# Altium PCB PCB1.PcbDoc
Units mm, origin at the board's own origin, x right, y up, seen from the top; angles counter-clockwise.
Board outline 108.7 x 104.5 mm, 2 copper layers (Top Layer, Bottom Layer); 73 components, 40 nets, 200 pads, 23 vias.
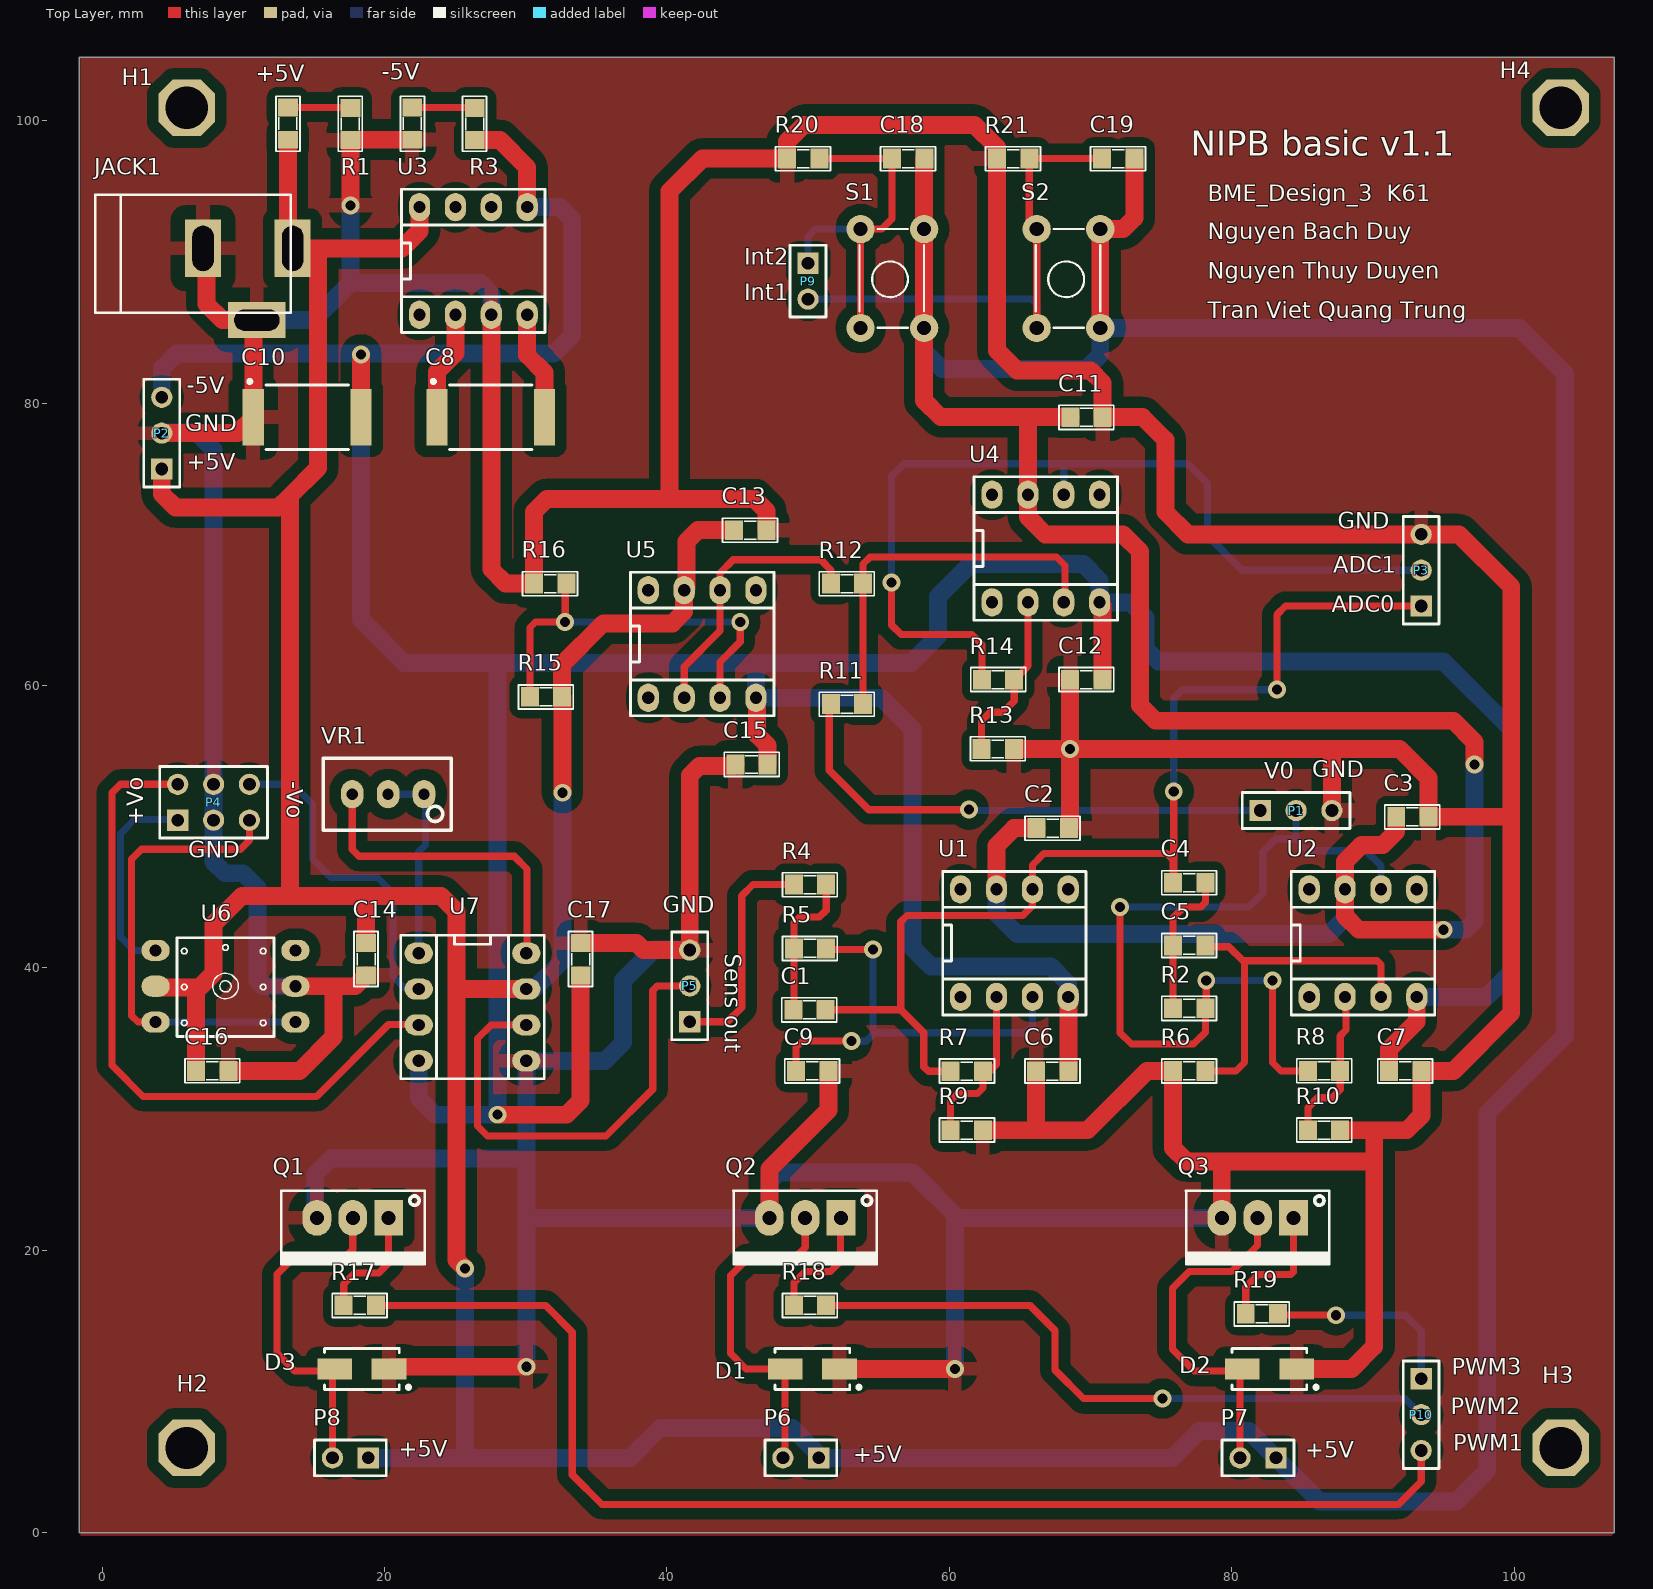
[diagram p0: Top Layer view]
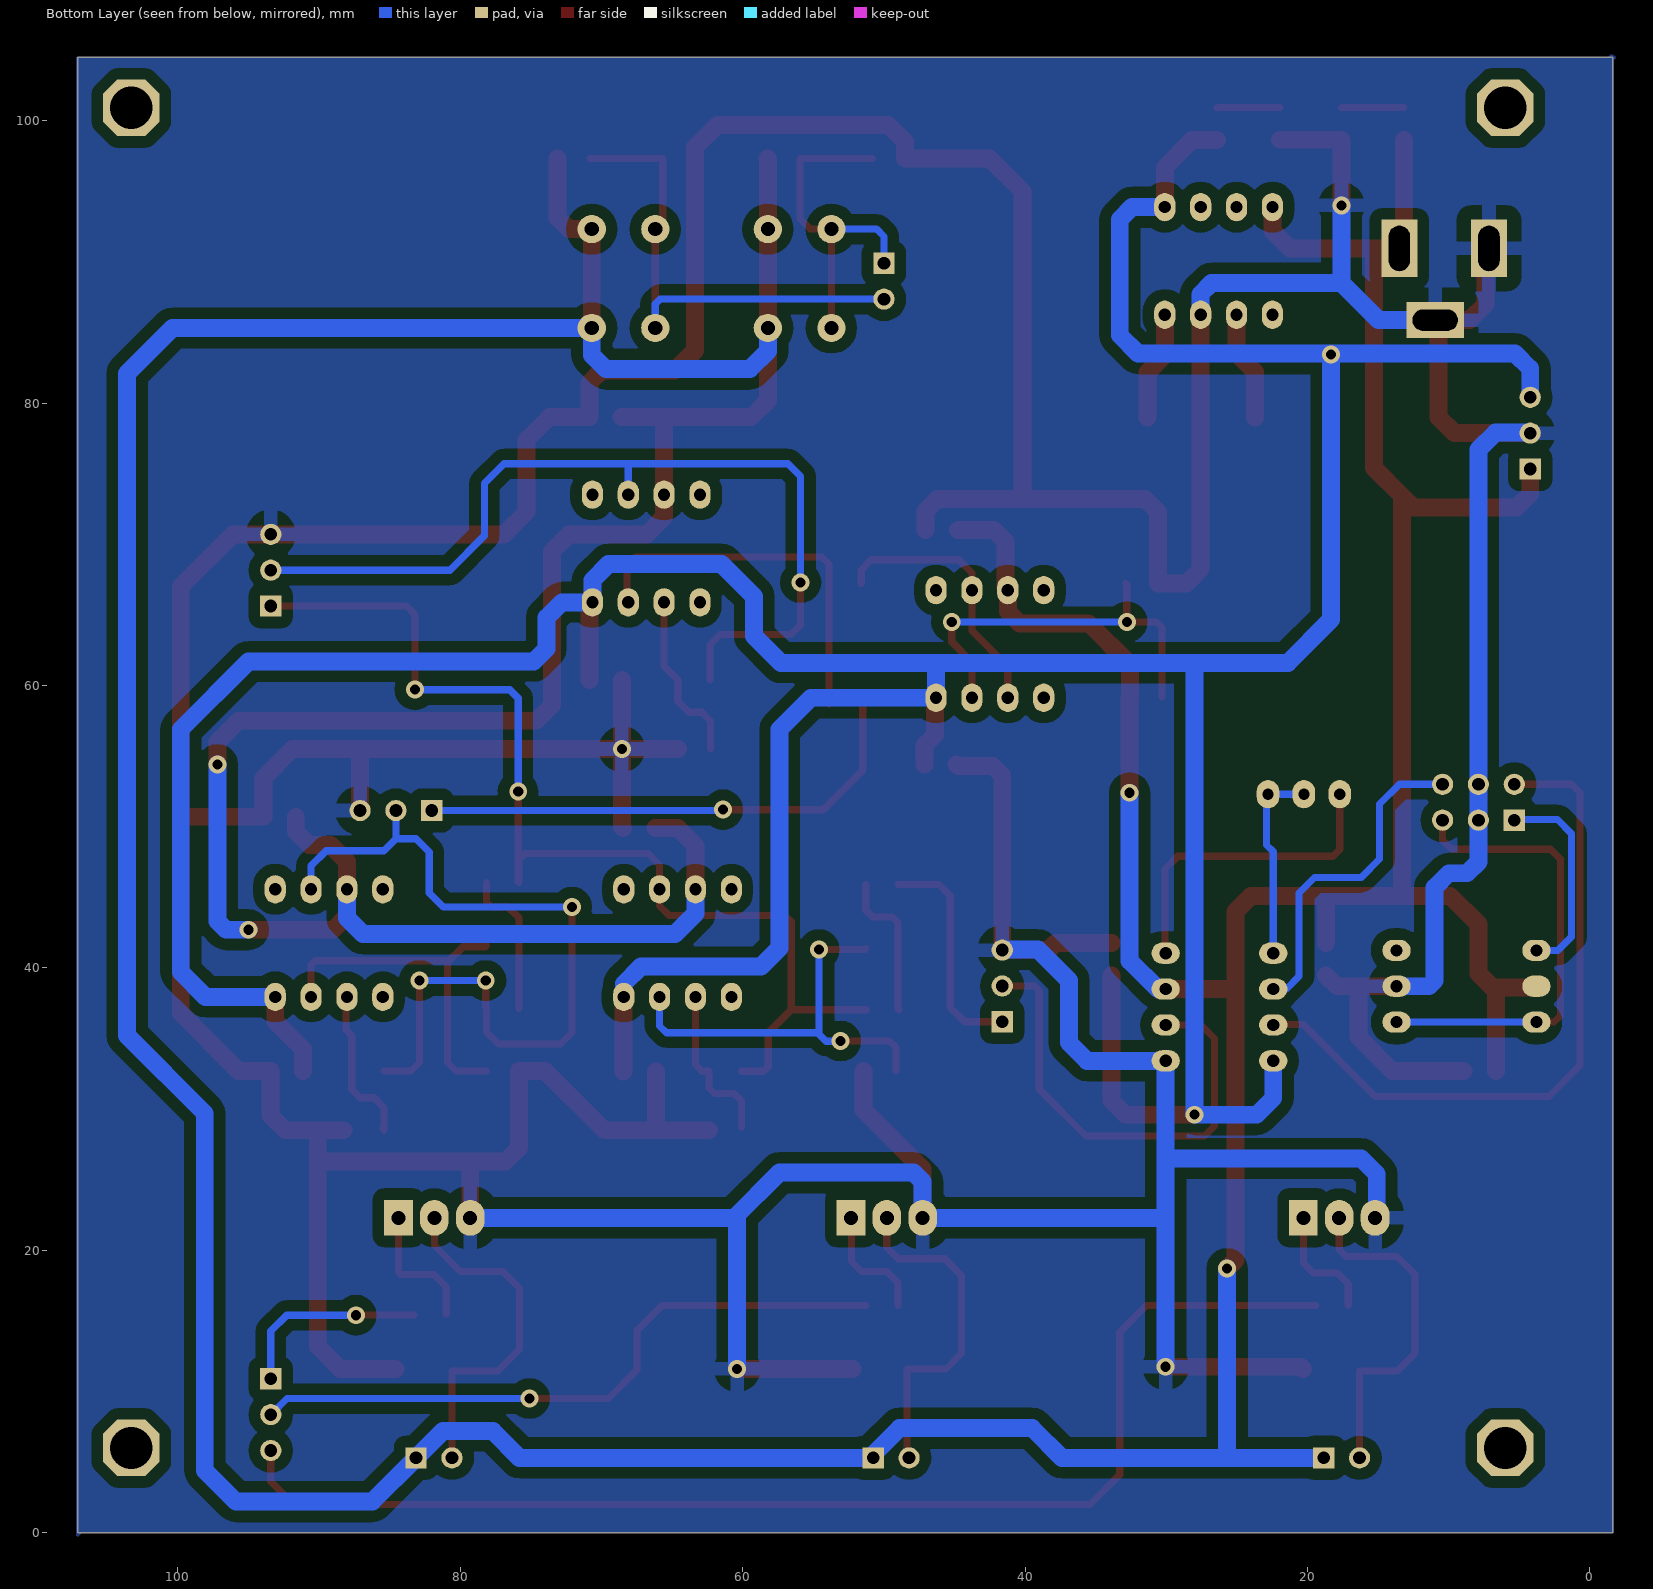
[diagram p1: Bottom Layer view, seen from below]
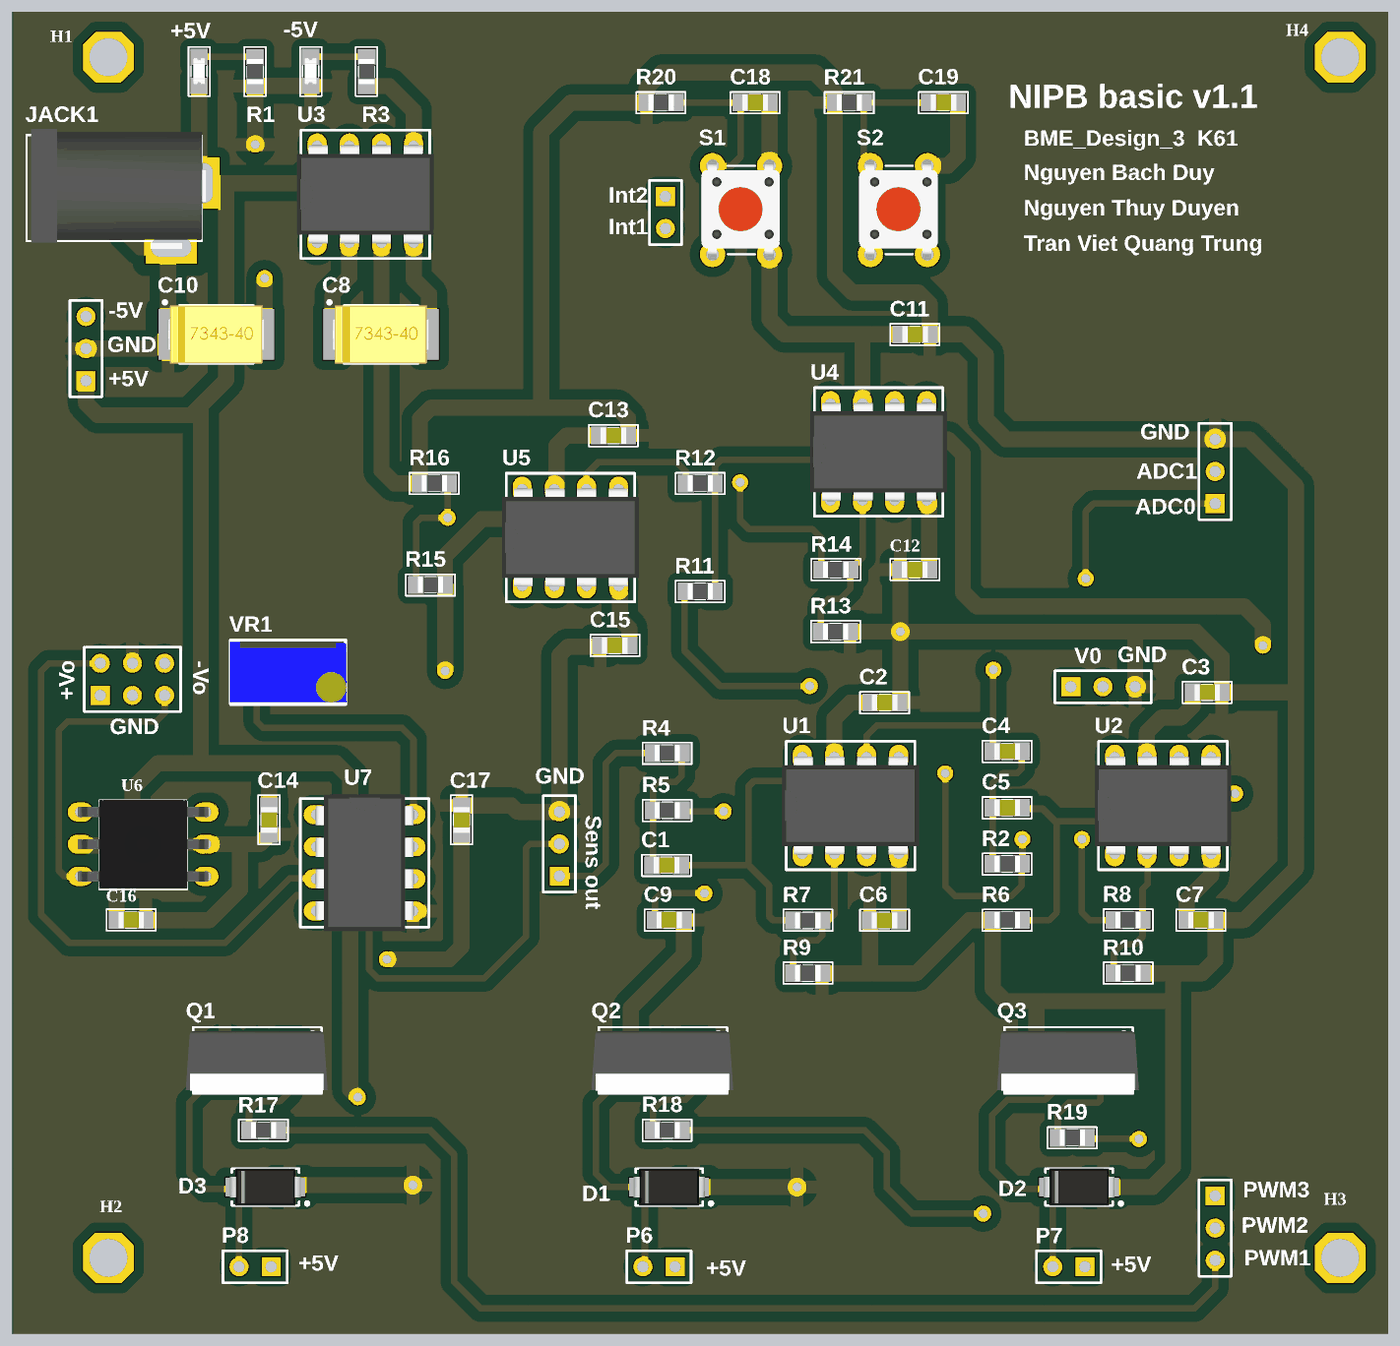
[diagram p2: 3D render of the assembled board from above, using the file's embedded part models]

## Layer stack, top to bottom
Top Solder: solder mask 0.0102, Solder Resist, Dk 3.5
Top Layer: signal copper 0.0356
Dielectric 1: dielectric 0.32, FR-4, Dk 4.8
Bottom Layer: signal copper 0.0356
Bottom Solder: solder mask 0.0102, Solder Resist, Dk 3.5

## Board outline
-1.6,0 107.1,0 107.1,104.5 -1.6,104.5

## Design rules (kind name [scope] priority, off if disabled: settings)
Clearance Clearance_1 [All] p1: gap=0.4 ignorepadtopadclearanceinfootprint=FALSE except(0.8: Arc-Fill Arc-Poly Arc-Region Track-Fill Track-Poly Track-Region SMDPad-Fill SMDPad-Poly SMDPad-Region THPad-Fill THPad-Poly THPad-Region Via-Fill Via-Poly Via-Region Fill-Fill Fill-Poly Fill-Region Poly-Poly Poly-Region Region-Region)
Clearance polygon_clearance [InPolygon] p2: gap=2 ignorepadtopadclearanceinfootprint=FALSE
PlaneClearance [All] p1: clearance=0.51
PolygonConnect [All] p1: connectstyle=Relief reliefconductorwidth=1 reliefentries=4 polygonreliefangle="90 Angle" airgapwidth=1
RoutingVias [All] p1: holewidth=0.711 width=1.27 viastyle="Through Hole" minholewidth=0.711 minwidth=1.27 maxholewidth=0.711 maxwidth=1.27
SolderMaskExpansion [All] p1: expansion=0.102
Width [All] p1: maxlimit=1.27 minlimit=0.3 preferedwidth=0.508
29 further rules are at their usual default settings.

## Components (designator, comment, footprint, x,y, rotation, side; value= is the part's Value field where it differs from the comment)
+5V "LED" "LED SMD 0805" 13.1,99.8 r90 top
-5V "LED" "LED SMD 0805" 21.906,99.8 r90 top
C1 "1uF" "0805 CAP" 50.1,37.039 r0 top
C2 "104" "0805 CAP" 67.325,49.9 r0 top
C3 "104" "0805 CAP" 92.8,50.7 r0 top
C4 "10uF" "0805 CAP" 77,46.035 r0 top
C5 "10uF" "0805 CAP" 77,41.59 r0 top
C6 "104" "0805 CAP" 67.3,32.675 r180 top
C7 "104" "0805 CAP" 92.3,32.7 r0 top
C8 "10uF" "CAP TANTALUM SMD7434" 27.4,78.989 r0 top
C9 "1uF" "0805 CAP" 50.3,32.7 r0 top
C10 "10uF" "CAP TANTALUM SMD7434" 14.4,78.989 r0 top
C11 "104" "0805 CAP" 69.725,79 r0 top
C12 "104" "0805 CAP" 69.7,60.4 r180 top
C13 "104" "0805 CAP" 45.904,71 r0 top
C14 "104" "0805 CAP" 18.7,40.61 r270 top
C15 "104" "0805 CAP" 46,54.4 r180 top
C16 "104" "0805 CAP" 7.8,32.7 r180 top
C17 "104" "0805 CAP" 33.9,40.61 r270 top
C18 "104" "0805 CAP" 57.093,97.315 r0 top
C19 "104" "0805 CAP" 71.964,97.315 r0 top
D1 "DIODE" "DIODE SMA" 50.3,11.6 r180 top
D2 "DIODE" "DIODE SMA" 82.674,11.6 r180 top
D3 "DIODE" "DIODE SMA" 18.4,11.6 r180 top
H1 "HOLE" HOLE 6,100.9 r0 top
H2 "HOLE" HOLE 6,6 r0 top
H3 "HOLE" HOLE 103.3,6 r0 top
H4 "HOLE" HOLE 103.3,100.9 r0 top
JACK1 "JACK DC" "JACK DC" 10.328,88.41 r0 top value="Jac DC"
P1 "Header 3H" HDR1X3 82.02,51.143 r0 top
P2 "Header 3H" HDR1X3 4.232,75.329 r90 top
P3 "Header 3H" HDR1X3 93.424,65.62 r90 top
P4 "Header 3X2" HDR2X3 5.36,50.46 r0 top
P5 "Header 3H" HDR1X3 41.623,36.179 r90 top
P6 "Valve" HDR1X2 50.76,5.3 r180 top
P7 "Valve" HDR1X2 83.134,5.3 r180 top
P8 "Pump" HDR1X2 18.86,5.3 r180 top
P9 "Header 2H" HDR1X2 50,89.9 r270 top
P10 "Header 3H" HDR1X3 93.424,10.9 r270 top
Q1 "TIP41C" QTO-220 20.3,22.3 r180 top
Q2 "TIP41C" QTO-220 52.34,22.3 r180 top
Q3 "TIP41C" QTO-220 84.38,22.3 r180 top
R1 "10k" "0805 RESISTOR" 17.594,100.908 r270 top value="R1/4W - 1K"
R2 "33k" "0805 RESISTOR" 75.857,37.145 r0 top value="R1/4W - 1K"
R3 "10k" "0805 RESISTOR" 26.4,100.908 r270 top value="R1/4W - 1K"
R4 "33k" "0805 RESISTOR" 49,45.9 r0 top value="R1/4W - 1K"
R5 "33k" "0805 RESISTOR" 49,41.378 r0 top value="R1/4W - 1K"
R6 "33K" "0805 RESISTOR" 75.857,32.7 r0 top value="R1/4W - 1K"
R7 "5.6k" "0805 RESISTOR" 62.386,32.675 r180 top value="R1/4W - 1K"
R8 "5.6k" "0805 RESISTOR" 87.686,32.7 r180 top value="R1/4W - 1K"
R9 "10k" "0805 RESISTOR" 62.386,28.5 r180 top value="R1/4W - 1K"
R10 "10k" "0805 RESISTOR" 87.686,28.5 r180 top value="R1/4W - 1K"
R11 "10k" "0805 RESISTOR" 51.614,58.684 r0 top value="R1/4W - 1K"
R12 "10k" "0805 RESISTOR" 51.614,67.218 r0 top value="R1/4W - 1K"
R13 "10k" "0805 RESISTOR" 64.575,55.5 r180 top value="R1/4W - 1K"
R14 "10k" "0805 RESISTOR" 64.6,60.4 r180 top value="R1/4W - 1K"
R15 "10k" "0805 RESISTOR" 30.3,59.2 r0 top value="R1/4W - 1K"
R16 "2.2k" "0805 RESISTOR" 30.6,67.218 r0 top value="R1/4W - 1K"
R17 "10k" "0805 RESISTOR" 17.114,16.1 r0 top value="R1/4W - 1K"
R18 "10k" "0805 RESISTOR" 49,16.1 r0 top value="R1/4W - 1K"
R19 "10k" "0805 RESISTOR" 81,15.5 r0 top value="R1/4W - 1K"
R20 "10k" "0805 RESISTOR" 48.515,97.315 r0 top value="R1/4W - 1K"
R21 "10k" "0805 RESISTOR" 63.386,97.315 r0 top value="R1/4W - 1K"
S1 "SWITCH" "SW 4PIN" 58.222,92.318 r270 top
S2 "SWITCH" "SW 4PIN" 70.694,92.318 r270 top
U1 "LM741" "DIP 8" 64.617,41.755 r0 top
U2 "LM741" "DIP 8" 89.3,41.755 r0 top
U3 "ICL7660" "DIP 8" 26.3,90.064 r0 top
U4 "LM741" "DIP 8" 66.838,69.7 r0 top
U5 "LM741" "DIP 8" 42.498,62.938 r0 top
U6 "MPS20N0040D" MPS20N0040D-S 13.7,41.24 r270 top
U7 "INA-129" "DIP 8" 26.241,37.229 r270 top
VR1 "10K" RVAR 20.26,52.3 r180 top value="VR 10K"

## Footprints (in the part's own frame and the unit in brackets; to place one, negate y for a bottom-side part, rotate by r counter-clockwise, add the part's x,y. Pads: shape width x height; smd on the part's side, far side on the other; paste and mask are expansions set on the pad)
"0805 CAP" [mil] "Compoment SMD 80x50mil"
  rect 50x55 smd: 1(-45,0) 2(45,0)
  silkscreen extent -77,-34 76,33, body extent -40,-25 40,25, height 24
"0805 RESISTOR" [mil] "Compoment SMD 80x50mil"
  rect 50x55 smd: 1(0,0) 2(90,0)
  silkscreen extent -32,-34 121,33, body extent 6,-25 84,25, height 24
"CAP TANTALUM SMD7434" [mm] "227C-220uF 16V"
  rect 1.5x4 smd: 1(-3.683,0) 2(3.937,0)
  silkscreen extent -4.06,-2.29 3.05,2.66, body extent -3.68,-2.3 3.92,2.3, height 4
"DIODE SMA" [mm]
  rect 2.45x1.5 smd: 1(-1.925,0) 2(1.925,0)
  silkscreen extent -3.43,-1.45 2.65,1.45, body extent -2.8,-1.48 2.8,1.47, height 2.7
"DIP 8" [mm] "W.300/L.400"
  oval 1.5x2 hole 0.864: 1(-3.81,-3.81) 2(-1.27,-3.81) 3(1.27,-3.81) 4(3.81,-3.81) 5(3.81,3.81) 6(1.27,3.81) 7(-1.27,3.81) 8(-3.81,3.81)
  silkscreen extent -5.08,-5.08 5.08,5.08, body extent -5.4,-3.88 5.4,3.88, height 4.5
HDR1X2 [mm] "Connector; Header; 2 Position"
  rect 1.5x1.5 hole 0.9: 1(0,0)
  round 1.5 hole 0.9: 2(2.54,0)
  silkscreen extent -1.27,-1.27 3.81,1.27
HDR1X3 [mm] "Connector; Header; 3 Position"
  rect 1.5x1.5 hole 0.9: 1(0,0)
  round 1.5 hole 0.9: 2(2.54,0) 3(5.08,0)
  silkscreen extent -1.27,-1.27 6.35,1.27
HDR2X3 [mm] "Connector; Header; 3x2 Position"
  rect 1.5x1.5 hole 0.9: 1(0,0)
  round 1.5 hole 0.9: 2(0,2.54) 3(2.54,0) 4(2.54,2.54) 5(5.08,0) 6(5.08,2.54)
  silkscreen extent -1.27,-1.27 6.35,3.81
HOLE [mm]
  oct 4x4 hole 3: H(0,0)
"JACK DC" [mm] "Jac DC input"
  rect 2.54x4.064 hole 1.5 slot 3.2 at 90 deg: 1(3.175,2.54) 2(-3.175,2.54)
  rect 4.064x2.54 hole 1.5 slot 3.2 at 0 deg: 3(0.635,-2.54)
  silkscreen extent -10.79,-2.03 3.05,6.35, body extent -10.42,-2.67 3.4,6.84, height 11.02
"LED SMD 0805" [mil] "Compoment SMD 80x50mil"
  rect 50x55 smd: 1(-45.39,-2.58) 2(44.61,-2.58)
  silkscreen extent -77,-37 76,30, body extent -41,-21 41,15, height 33
MPS20N0040D-S [mm]
  oval 1.5x2 hole 0.864: 1(5.08,-9.906) 3(0,-9.906) 4(0,0) 5(2.54,0) 6(5.08,0)
  oval 1.5x2 all layers, no hole: 2(2.54,-9.906)
  silkscreen extent -0.89,-8.38 6.1,-1.52, body extent -0.96,-10.1 6.04,0.2, height 10
QTO-220 [mil] "TO-220 - 1-2-3"
  rect 80x100 hole 39: 1(0,0)
  oval 80x100 hole 39: 2(100,0) 3(200,0)
  silkscreen extent -100,-76 300,130, body extent -119,-64 322,121, height 755
RVAR [mm] "Bien tro vi chinh"
  oval 1.6x2 hole 0.8: 1(-2.54,0) 2(0,0) 3(2.54,0)
  silkscreen extent -4.47,-2.54 4.6,2.54, body extent -4.54,-2.4 4.66,2.4, height 12.02
"SW 4PIN" [mm] "SW button 4pin, 250 x250 mil"
  round 2 hole 1: 1(0,0) 1(7,0) 2(0,-4.5) 2(7,-4.5)
  silkscreen extent 0,-4.57 6.98,0, body extent -0.52,-5.39 7.38,0.81, height 7

## Part data
C1 C2 C3 C4 C5 C6 C7 C9 C11 C12 C13 C14 C15 C16 C17 C18 C19: library part "CAP CERAMIC", LatestRevisionDate=17-Jul-2002, LatestRevisionNote="Re-released for DXP Platform.", PackageReference=RAD-0.3, Published=8-Jun-2000, Publisher="Altium Limited"
C8 C10: library part CAPACITOR
P6 P7 P8: library part "Header 2H", LatestRevisionDate=17-Jul-2002, LatestRevisionNote="Re-released for DXP Platform.", Publisher="Altium Limited"
Q1 Q2 Q3: "NPN 2W, BCE", =H1061
R1 R2 R3 R4 R5 R6 R7 R8 R9 R10 R11 R12 R13 R14 R15 R16 R17 R18 R19 R20 R21: library part RESISTOR
U3: library part ICL7660SIBAZ, "ICL7660 Series 1.5 - 12 Vin 45 mA 10-35 kHz CMOS Voltage Converter - SOIC-8", Package="SOIC-8 Intersil", Availability=Unavailable, MF="Renesas Electronics", MP=ICL7660SIBAZ, Price=None, SnapEDA_Link=https://www.snapeda.com/parts/ICL7660SIBAZ/Renesas%20Electronics%20America%20Inc./view-part/?ref=snap
VR1: library part "VAR RES"
P1 P2 P3 P4 P5 P9 P10: LatestRevisionDate=17-Jul-2002, LatestRevisionNote="Re-released for DXP Platform.", Publisher="Altium Limited"
S1 S2: LatestRevisionDate=17-Jul-2002, LatestRevisionNote="Re-released for DXP Platform.", PackageReference=SPST-2, Published=24-Mar-1999, Publisher="Altium Limited"

## Via types
v1: diameter 1.27, hole 0.711, Top Layer to Bottom Layer, 23 vias

## Nets (pads, with @x,y where several pads share a name; then routed paths per layer and width w, separated by ;. In a path a pad name is that pad's centre, name@x,y a point inside that pad or via, vN(x,y) a via of type N, cw(c..) or ccw(c..) an arc to the next point about the centre after c; other vN are vias at no path point)
+5V: +5V.1 C2.1 C3.1 C11.1 C13.1 C14.1 C16.2 C18.2 C19.2 JACK1.1 P2.1 P6.1 P7.1 P8.1 R15.2 S1.1 S2.1 U1.7 U2.7 U3.8 U4.7 U5.7 U6.2 U7.7 | length 576.5
  Top Layer w1.27: U6.2@4.056,38.613 6.913,38.613 ; P2.1 4.232,73.568 5.2,72.6 12.5,72.6 13.3,73.4 ; C16.2 6.657,38.357 6.913,38.613 ; +5V.1 13.165,91.288 JACK1.1 15.3,90.95 ; C14.1 18.7,44.5 ; U3.8 22.49,92.19 21.25,90.95 15.3,90.95 ; v1(25.7,18.7) 25.1,19.3 25.1,44 24,45.1 13.3,45.1 ; U7.7 25.701,38.499 ; v1(32.6,52.4) 32.6,59.186 R15.2 32.586,61.486 35.5,64.4 40.4,64.4 41.228,65.228 U5.7 41.4,66.92 41.4,70.2 42.2,71 C13.1 ; C18.2 58.222,97.301 58.222,92.318 58.222,85.318 58.222,80.178 59.4,79 65.568,79 ; U1.7 63.347,48.647 64.6,49.9 C2.1 ; C11.1 65.568,79 ; S2.1@70.694,85.318 70.694,92.318 72.318,92.318 73.107,93.107 C19.2 ; C3.1 91.657,49.657 90.7,48.7 89.2,48.7 88.03,47.53 U2.7 88.03,43.67 89,42.7 v1(95,42.7) ; v1(97.2,54.4) 97.2,56 95.7,57.5 74.6,57.5 73.5,58.6 73.5,69.5 72.3,70.7 66.8,70.7 65.568,71.932 U4.7 65.568,79 ; 6.913,38.613 7.9,39.6 7.9,43.1 9.9,45.1 13.3,45.1 ; 13.3,45.1 13.3,73.4 ; 13.3,73.4 15.3,75.4 15.3,90.95 ; 25.7,38.5 25.701,38.499
  Bottom Layer w1.27: P8.1 25.8,5.3 ; v1(25.7,18.7) 25.7,5.4 25.8,5.3 ; U7.7 30.599,38.499 32.6,40.5 v1(32.6,52.4) ; S1.1@58.222,85.318 58.222,83.678 59.5,82.4 69.7,82.4 70.694,83.394 70.694,85.318 100.382,85.318 103.6,82.1 103.6,35.2 98.1,29.7 98.1,4.4 95.9,2.2 86.234,2.2 P7.1 81.234,7.2 77.7,7.2 75.8,5.3 P6.1 50.76,5.54 48.9,7.4 39.5,7.4 37.4,5.3 25.8,5.3 ; U1.7 63.347,43.853 64.8,42.4 86.9,42.4 88.03,43.53 U2.7 ; v1(95,42.7) 96.6,42.7 97.2,43.3 v1(97.2,54.4)
-5V: C6.1 C7.1 C10.2 C12.1 C15.1 C17.2 P2.3 R3.2 U1.4 U2.4 U3.5 U4.4 U5.4 U7.4 | length 313.9
  Top Layer w1.27: C10.2 v1(18.337,83.437) ; R3.2 28.178,98.622 30.11,96.69 U3.5 ; v1@28.3,29.6 32.9,29.6 33.9,30.6 C17.2 ; U5.4 46.4,59.036 46.4,56.5 47.143,55.757 C15.1 ; U1.4 68.443,37.929 C6.1 ; U4.4 70.843,65.695 C12.1 ; C7.1 91.157,34.257 93.11,36.21 U2.4
  Bottom Layer w1.27: P2.3 4.232,82.432 5.3,83.5 32,83.5 33.3,84.8 33.3,93 32.426,93.874 U3.5 ; v1(18.337,83.437) 18.337,64.663 21.4,61.6 28,61.6 ; U7.4 22.431,30.769 23.6,29.6 v1(28,29.6) 28,61.6 ; U1.4 68.427,38.873 67.2,40.1 58.7,40.1 57.4,41.4 57.4,56.9 55.172,59.128 U5.4 46.308,61.6 ; U2.4 98.045,37.945 99.8,39.7 99.8,56.9 95,61.7 74.8,61.7 73.9,62.6 73.9,64.8 72.81,65.89 U4.4 70.648,67.452 69.5,68.6 61.5,68.6 59.2,66.3 59.2,63.5 57.3,61.6 46.308,61.6 ; 28,61.6 46.308,61.6
ADC0: C1.2 C4.1 P3.1 R7.2 U1.6 | length 79.5
  Top Layer w0.508: C1.2 56.561,37.039 ; R7.2 58.525,32.675 58.2,33 58.2,35.4 56.561,37.039 ; v1(75.9,52.5) 75.9,46.078 C4.1 75.857,47.643 75.4,48.1 66.7,48.1 65.887,47.287 U1.6 65.887,44.387 65.2,43.7 57,43.7 56.561,43.261 56.561,37.039 ; v1(83.2,59.7) 83.2,65 83.82,65.62 P3.1
  Bottom Layer w0.508: v1(75.9,52.5) 75.9,59.1 76.5,59.7 v1(83.2,59.7)
ADC1: P3.2 R14.2 U4.6 | length 65.4
  Top Layer w0.508: v1(55.9,67.3) 55.9,64.3 56.6,63.6 61.6,63.6 62.314,62.886 R14.2
  Bottom Layer w0.508: v1(55.9,67.3) 55.9,74.8 56.8,75.7 68.1,75.7 ; U4.6 68.108,75.692 68.1,75.7 ; P3.2 80.74,68.16 78.3,70.6 78.3,74.3 76.9,75.7 68.1,75.7
GND: -5V.1 C2.2 C3.2 C6.2 C7.2 C9.2 C10.1 C11.2 C12.2 C13.2 C14.2 C15.2 C16.1 C17.1 D1.1 D2.1 D3.1 JACK1.2 JACK1.3 P1.3 P2.2 P3.3 P4.3 P4.4 P5.3 Q1.3 Q2.3 Q3.3 R1.2 R6.1 R9.1 R10.1 R13.1 R16.1 R20.1 R21.1 U3.3 U6.5 U7.5 | length 617
  Top Layer w1.27: P2.2 9.597,77.869 C10.1 10.717,85.624 JACK1.3 8.53,85.87 7.4,87 7.4,90.703 JACK1.2 ; C16.1 14,32.7 16.4,35.1 16.4,38.7 ; U6.5@13.8,38.7 16.4,38.7 ; v1(17.6,94) 17.594,94.006 R1.2 17.619,98.647 -5V.1 ; C14.2 17.933,38.7 16.4,38.7 ; D3.1 20.476,11.751 v1(30.051,11.751) ; U3.3 27.57,68.23 28.582,67.218 R16.1 30.6,72.3 31.5,73.2 40.1,73.2 ; C17.1 37.847,41.753 38.341,41.259 P5.3 41.623,53.623 42.3,54.3 44.757,54.3 C15.2 ; C13.2 47.047,72.353 46.2,73.2 40.1,73.2 ; Q2.3 47.26,25.76 51.443,29.943 C9.2 ; D1.1 v1@60.2,11.6 ; R9.1 66.093,28.5 ; R13.1 v1(68.557,55.5) ; C6.2 66.157,28.564 66.093,28.5 ; C2.2 68.557,49.989 v1(68.557,55.5) ; C12.2 v1(68.557,55.5) ; Q3.3 79.3,26.3 ; D2.1 88.5,11.6 90.1,13.2 90.1,26.3 ; P1.3 87.1,55.1 87.5,55.5 ; R10.1@88.286,28.5 90.1,28.5 ; 40.1,73.2 40.2,73.3 40.2,95 42.515,97.315 R20.1 48.515,98.515 49.7,99.7 61.8,99.7 63.386,98.114 R21.1 63.386,83.714 64.8,82.3 70,82.3 70.868,81.432 C11.2 73.7,79 75.3,77.4 75.3,72.3 76.9,70.7 P3.3 96.1,70.7 99.8,67 99.8,50.7 ; 66.093,28.5 69.8,28.5 74,32.7 R6.1 75.857,27.243 76.8,26.3 79.3,26.3 ; v1(68.557,55.5) 87.5,55.5 ; 79.3,26.3 90.1,26.3 ; 87.5,55.5 91.9,55.5 93.943,53.457 C3.2 99.8,50.7 ; 90.1,26.3 90.1,28.5 ; 90.1,28.5 92.4,28.5 93.443,29.543 C7.2 95.7,32.7 99.8,36.8 99.8,50.7
  Bottom Layer w1.27: P2.2 4.263,77.9 6.7,77.9 7.9,76.7 P4.4 P4.3 7.9,47.5 8.7,46.7 10,46.7 11,45.7 11,39.1 11.4,38.7 U6.5 ; JACK1.3 14.97,85.87 17.6,88.5 ; Q1.3 15.1,22.42 15.1,25.4 16.2,26.5 30.051,26.5 ; v1(17.6,94) 17.6,88.5 ; U3.3 27.57,87.67 27.6,87.7 26.8,88.5 17.6,88.5 ; v1(30.051,11.751) 30.051,22.2 ; P5.3 41.582,41.3 39.1,41.3 36.9,39.1 36.9,34.7 35.619,33.419 U7.5 30.051,26.5 ; v1(60.4,11.6) 60.4,22.1 60.6,22.3 ; Q3.3 60.6,22.3 ; 30.051,22.2 30.051,26.5 ; 30.051,22.2 30.151,22.3 Q2.3 47.26,24.86 47.9,25.5 57.4,25.5 60.6,22.3
Interrupt2: C19.1 P9.2 R21.2 S2.2 | length 35.4
  Top Layer w0.508: S2.2@66.194,85.318 66.194,92.318 65.672,92.84 R21.2 C19.1
  Bottom Layer w0.508: P9.2 65.84,87.36 66.194,87.006 S2.2@66.194,85.318
Net+5V_2: +5V.2 R1.1 | length 4.4
  Top Layer w0.508: +5V.2 17.568,100.933 R1.1
Net-5V_2: -5V.2 R3.1 | length 4.4
  Top Layer w0.508: -5V.2 26.375,100.933 R3.1
NetC1_1: C1.1 R4.2 R5.1 | length 10.6
  Top Layer w0.508: C1.1 49,37.082 R5.1 49,43.2 49.4,43.6 50.8,43.6 51.286,44.086 R4.2
NetC4_2: C4.2 C5.1 R2.1 | length 10.5
  Top Layer w0.508: R2.1 C5.1 75.857,43.557 76.6,44.3 77.8,44.3 78.143,44.643 C4.2
NetC5_2: C5.2 R6.2 U2.3 | length 25.5
  Top Layer w0.508: R6.2 80.3,32.7 80.9,33.3 80.9,40.4 80.8,40.5 ; C5.2 78.233,41.5 79.8,41.5 80.8,40.5 ; U2.3 90.57,40.23 90.3,40.5 80.8,40.5
NetC8_1: C8.1 U3.2 | length 7.8
  Top Layer w1.27: C8.1 23.717,82.217 25.03,83.53 U3.2
NetC8_2: C8.2 U3.4 | length 7.8
  Top Layer w1.27: U3.4 30.11,83.39 31.337,82.163 C8.2
NetC9_1: C9.1 R5.2 U1.3 | length 30.2
  Top Layer w0.508: C9.1 49.157,34.374 49.6,34.817 53.067,34.817 53.083,34.8 v1@53.1,34.8 ; R5.2 51.364,41.3 v1(54.6,41.3)
  Bottom Layer w0.508: v1(53.083,34.817) 53.1,34.8 54.1,34.8 54.6,35.3 v1(54.6,41.3) ; 54.8,35.4 65.4,35.4 65.887,35.887 U1.3
NetC18_1: C18.1 P9.1 R20.2 S1.2 | length 24.8
  Top Layer w0.508: R20.2 C18.1 55.95,93.05 55.218,92.318 53.722,92.318 S1.2@53.722,85.318
  Bottom Layer w0.508: P9.1 50,91.8 50.518,92.318 S1.2@53.722,92.318
NetD1_2: D1.2 P6.2 Q2.2 | length 24.4
  Top Layer w0.508: P6.2 48.375,5.455 D1.2 45.6,11.6 44.5,12.7 44.5,18.2 45.7,19.4 49,19.4 49.8,20.2 Q2.2
NetD2_2: D2.2 P7.2 Q3.2 | length 25.1
  Top Layer w0.508: P7.2 80.594,11.445 77.355,11.445 75.8,13 75.8,17.3 77,18.5 80,18.5 81.84,20.34 Q3.2
NetD3_2: D3.2 P8.2 Q1.2 | length 24.5
  Top Layer w0.508: P8.2 16.32,11.445 13.655,11.445 12.4,12.7 12.4,18.3 13.66,19.56 17.26,19.56 17.76,20.06 Q1.2
NetP1_2: P1.2 R2.2 R8.2 U2.6 | length 59.2
  Top Layer w0.508: v1(72.1,44.3) 72.1,35.4 72.9,34.6 77.3,34.6 78.143,35.443 R2.2 78.2,37.202 v1(78.2,39.1) ; v1(82.9,39.1) 82.9,33.3 83.5,32.7 R8.2
  Bottom Layer w0.508: v1(72.1,44.3) 81.2,44.3 82.2,45.3 82.2,48.2 83.14,49.14 84.56,49.14 ; v1(78.2,39.1) v1(82.9,39.1) ; P1.2 84.56,49.14 ; U2.6 90.57,47.23 89.5,48.3 85.4,48.3 84.56,49.14
NetP4_1: P4.1 U6.3 | length 14.7
  Bottom Layer w0.508: U6.3 2.26,41.24 1.3,42.2 1.3,49.5 2.3,50.5 5.32,50.5 P4.1
NetP4_2: P4.2 U7.3 | length 49
  Top Layer w0.508: P4.2 1.3,53 0.7,52.4 0.7,33.1 2.9,30.9 15.2,30.9 20.3,36 22.39,36 U7.3
NetP4_5: P4.5 U6.1 U6.6 | length 33.2
  Top Layer w0.508: U6.1 2.54,36.16 2.1,36.6 2.1,47.7 2.8,48.4 9.8,48.4 10.44,49.04 P4.5
  Bottom Layer w0.508: U6.1 U6.6
NetP4_6: P4.6 U7.2 | length 23.7
  Bottom Layer w0.508: P4.6 13.5,53 14.9,51.6 14.9,47.7 16.2,46.4 19.5,46.4 20.6,45.3 20.6,39.4 21.501,38.499 U7.2
NetP5_2: P5.2 U7.6 | length 33.9
  Top Layer w0.508: U7.6 27.559,35.959 26.6,35 26.6,28.8 27.3,28.1 35.7,28.1 39,31.4 39,38.4 39.319,38.719 P5.2
NetQ1_1: Q1.1 R17.1 | length 8.5
  Top Layer w0.508: R17.1 17.114,17.614 17.9,18.4 19.6,18.4 20.3,19.1 Q1.1
NetQ2_1: Q2.1 R18.1 | length 8.6
  Top Layer w0.508: R18.1 49,17.7 49.8,18.5 51.6,18.5 52.3,19.2 52.3,22.26 Q2.1
NetQ3_1: Q3.1 R19.1 | length 9.5
  Top Layer w0.508: R19.1 81,17.4 81.88,18.28 84.18,18.28 84.38,18.48 Q3.1
NetR7_1: R7.1 R9.2 U1.2 | length 11.7
  Top Layer w0.508: R9.2@60.1,28.7 60.1,30.6 60.6,31.1 62,31.1 62.386,31.486 R7.1 62.869,32.675 63.347,33.153 U1.2
NetR8_1: R8.1 R10.2 U2.2 | length 11.3
  Top Layer w0.508: R10.2@85.514,28.614 R10.2 85.4,30.1 86.1,30.8 87.1,30.8 87.686,31.386 R8.1 87.686,35.186 88.1,35.6 88.1,37.875 U2.2
NetR11_2: R11.2 R12.2 U4.3 | length 27.3
  Top Layer w0.508: R11.2 R12.2 53.9,68.6 54.4,69.1 67.6,69.1 68.2,68.5 68.2,65.982 U4.3
NetR13_2: R13.2 R14.1 U4.2 | length 12.3
  Top Layer w0.508: R13.2 62.289,57.489 62.9,58.1 63.8,58.1 64.6,58.9 R14.1 65.568,61.368 U4.2
NetR15_1: R15.1 R16.2 U5.3 | length 28.7
  Top Layer w0.508: R15.1 30.3,64.1 30.7,64.5 v1(32.8,64.5) 32.8,67.132 R16.2 ; U5.3 43.768,61.668 45.2,63.1 v1(45.2,64.5)
  Bottom Layer w0.508: v1(32.8,64.5) v1(45.2,64.5)
NetU7_1: U7.1 VR1.1 VR1.2 | length 14
  Bottom Layer w0.508: VR1.2 VR1.1 22.9,52.2 22.9,48.7 22.431,48.231 U7.1
NetU7_8: U7.8 VR1.3 | length 22.9
  Top Layer w0.508: VR1.3 17.72,48.38 18.2,47.9 29.2,47.9 30.1,47 30.1,41.088 U7.8
PWM1: P10.3 R17.2 | length 88.6
  Top Layer w0.508: R17.2 31.4,16.1 33.3,14.2 33.3,4.1 35.4,2 91.8,2 93.424,3.624 P10.3
PWM2: P10.2 R18.2 | length 47
  Top Layer w0.508: R18.2 65.7,16.1 67.5,14.3 67.5,11.5 69.5,9.5 v1(75.1,9.5)
  Bottom Layer w0.508: v1(75.1,9.5) 92.284,9.5 P10.2
PWM3: P10.1 R19.2 | length 14
  Top Layer w0.508: R19.2@83.286,15.425 87.375,15.425 v1(87.4,15.4)
  Bottom Layer w0.508: v1(87.4,15.4) 92.3,15.4 93.424,14.276 P10.1
Sensor_Pressure_Out: P5.1 R4.1 | length 16
  Top Layer w0.508: P5.1 44.279,36.179 45.3,37.2 45.3,45.1 46.1,45.9 R4.1
V0: P1.1 R11.1 | length 36.4
  Top Layer w0.508: R11.1 51.5,58.57 51.5,54 54.3,51.2 v1(61.4,51.2)
  Bottom Layer w0.508: v1(61.4,51.2) 61.457,51.143 P1.1
V1: R12.1 U5.2 U5.6 | length 19.4
  Top Layer w0.508: U5.2 41.228,61.328 43.768,63.868 U5.6 43.768,67.968 44.7,68.9 50.9,68.9 51.614,68.186 R12.1
pads on no net: H1.H H2.H H3.H H4.H U1.1 U1.5 U1.8 U2.1 U2.5 U2.8 U3.1 U3.6 U3.7 U4.1 U4.5 U4.8 U5.1 U5.5 U5.8 U6.4

## Polygon pours and split planes (outlines as drawn)
GND on Bottom Layer "bot" (solid, remove dead copper, pour order 38): -1.5,104.7 -1.3,104.5 107.2,104.5 107.2,-0.4 106.8,0 -1.7,0 -1.7,104.3 -1.9,104.5
GND on Top Layer "Top Layer-No Net" (solid, remove dead copper, pour order 36): -1.5,104.5 107.1,104.5 107.1,0 106.9,-0.2 -1.5,-0.2

## Silkscreen, mask and mechanical layers (free items; w line width, h text height)
Top Overlay:
  text "NIPB basic v1.1" at 77.1,96.9 h3
  text "BME_Design_3  K61" at 78.3,93.9 h2
  text "Nguyen Bach Duy" at 78.3,91.2 h2
  text "Int2" at 45.5,89.4 h2
  text "Nguyen Thuy Duyen" at 78.3,88.4 h2
  text "Int1" at 45.5,86.9 h2
  text "Tran Viet Quang Trung" at 78.3,85.6 h2
  text "-5V" at 6,80.3 h2
  text "GND" at 5.9,77.6 h2
  text "+5V" at 6,74.9 h2
  text "GND" at 87.5,70.7 h2
  text "ADC1" at 87.2,67.6 h2
  text "ADC0" at 87.1,64.8 h2
  text "GND" at 85.7,53.1 h2
  text "V0" at 82.3,53 h2
  text "GND" at 6.1,47.404 h2
  text "GND" at 39.7,43.5 h2
  text "Sens out" at 43.7,41 h2 r270
  text "PWM3" at 95.6,10.8 h2
  text "PWM2" at 95.5,8 h2
  text "PWM1" at 95.7,5.4 h2
  text "+5V" at 21,5 h2
  text "+5V" at 85.2,4.9 h2
  text "+5V" at 53.2,4.6 h2

## Text inside footprints (layer, text, board x,y; h text height)
P4: Top Overlay "+Vo" at 3.3,50.1 h2 r90; Top Overlay "-Vo" at 12.7,53.2 h2 r270